# EAGLE board Final_v2 (EAGLE 8.6.3), part 1 of 7
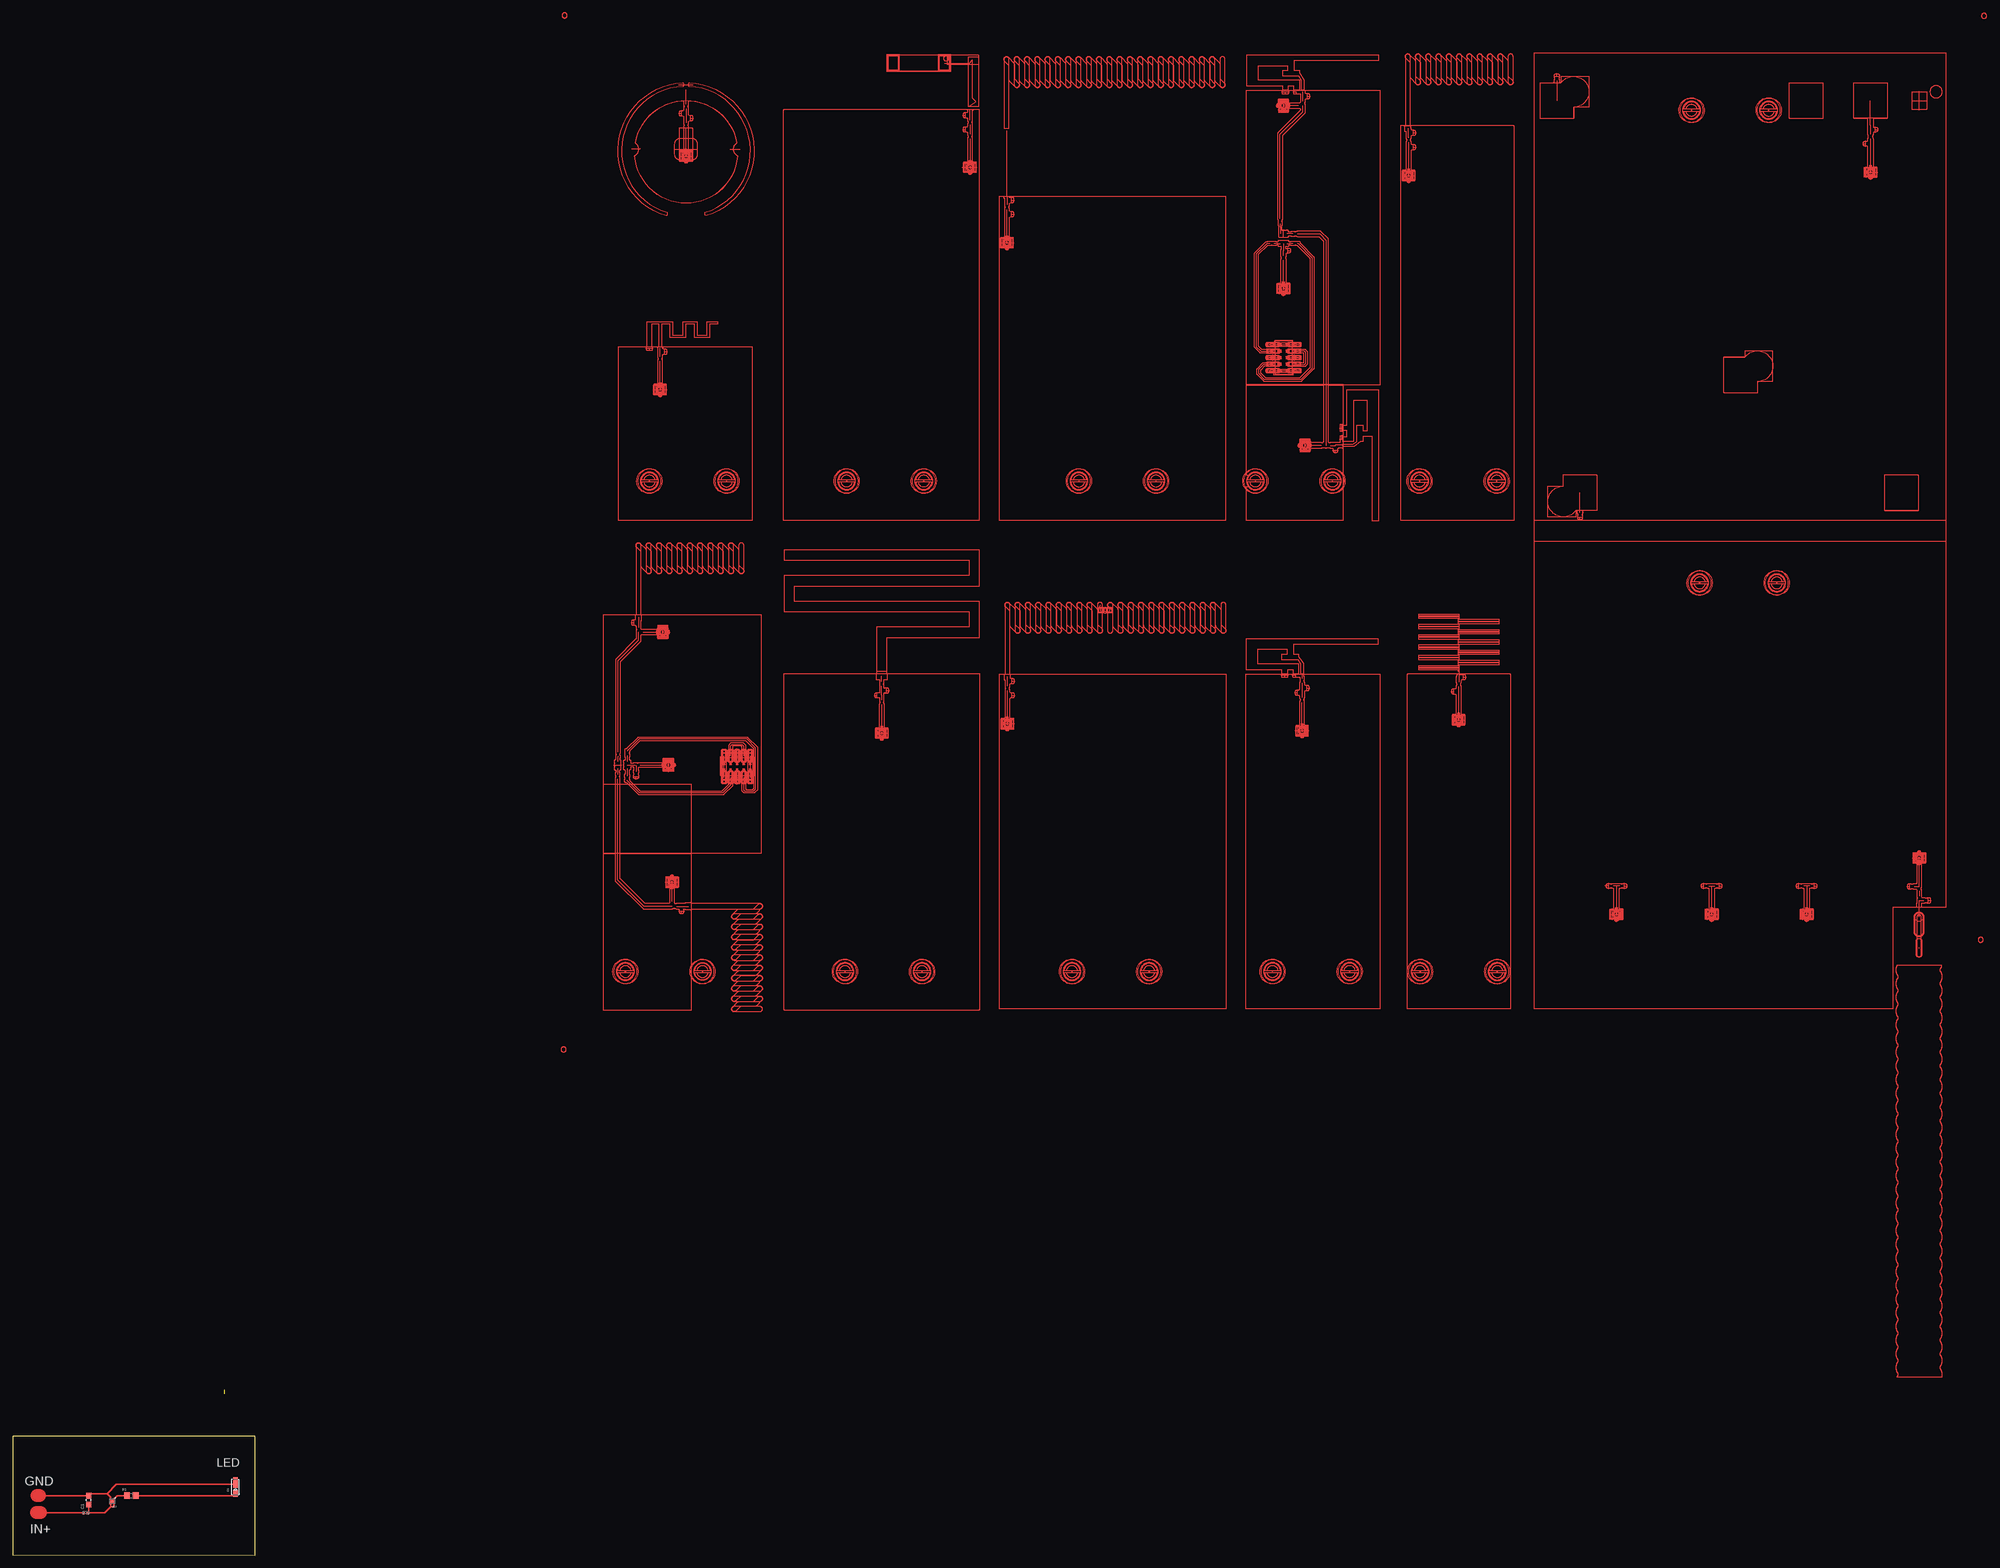
[diagram p0: board, top side]

Size 47.13 x 23.12 mm. Coordinates in mm from the lower left corner, seen from the top.
Outline: 0,0.02 47.13,0 47.13,23.09 0.01,23.12 0,0.02
Copper layers (1*16): Top 0.035mm / dielectric 1.5mm / Bottom 0.035mm
Design rules "default": minimum track width 6mil, minimum drill 0.35mm, track to track 6mil, track to pad 6mil, pad to pad 6mil, via to via 6mil, smd to smd 6mil, copper to edge 40mil, drill to drill 6mil, minimum pad ring 10mil, minimum via ring 8mil, stop-mask expansion 4mil, vias tented up to drill 0mil, thermal gap 10mil

## Footprints (pad centres in the part's own frame; a part is rotated, then mirrored left to right if it is on the bottom)
CAPC1608X90 = smd 1.1 x 1: 1 -0.85,0; 2 0.85,0
WL-SWTP_3014 = smd 2 x 0.8: 1 0.88,0 | smd 1.2 x 0.8: 2 -1.27,0
RESC1608X55 = smd 1.1 x 1.25: 1 -0.85,0; 2 0.85,0
0402_MURATA = smd 0.4 x 0.6: P$1 -0.4,0; P$2 0.4,0
REG_NCP160AMX180TBG = smd 0.1 x 0.1: 1 -0.325,-0.4; 2 0.325,-0.4; 3 0.325,0.4; 4 -0.325,0.4 | smd 0.52 x 0.52 rotated 45: 5 0,0

## Placement (x,y rotation side)
C1  06036D225KAT2A  [CAPC1608X90]  14.76,10.67 90 top
D1  WL-SWTP3014  [WL-SWTP_3014]  43.28,13.22 90 top
R1  CRCW06033K30FKEA  [RESC1608X55]  23.05,11.54 0 top
U$2  SCHOTTKY0402  [0402_MURATA]  14.21,8.22 0 top
U$3  NCP161_711AJ  [REG_NCP160AMX180TBG]  19.34,10.48 180 top

## Library data of the parts
C1 = Capacitor_2.2uF_0603; DESCRIPTION: 0603 2.2 uF 6.3 V ±10 % Tolerance X5R Surface Mount Multilayer Ceramic Capacitor; DIGI-KEY_PART_NUMBER: 478-1252-1-ND; DIGI-KEY_PURCHASE_URL: https://www.digikey.co.uk/product-detail/en/avx-corporation/06036D225KAT2A/478-1252-1-ND/564284?utm_source=snapeda&utm_medium=aggregator&utm_campaign=symbol; MF: AVX; MP: 06036D225KAT2A; PACKAGE: 0603 AVX
D1 = WL-SWTP; DESCRIPTION: SMD LED PLCC2 Daylight white 120 ° 3.2 V Wuerth Elektronik; DIGI-KEY_PART_NUMBER: 732-5661-1-ND; DIGI-KEY_PURCHASE_URL: https://www.digikey.co.uk/product-detail/en/wurth-electronics-inc/158301250/732-5661-1-ND/4947879?utm_source=snapeda&utm_medium=aggregator&utm_campaign=symbol; MF: Wurth Electronics; MP: 158301250; PACKAGE: 1206 Würth Elektronik
R1 = CRCW06033K30FKEA; DESCRIPTION: Res Thick Film 0603 3.3K Ohm 1% 0.1W_1/10W_ ?100ppm/C SMD Automotive Paper T/R; DIGI-KEY_PART_NUMBER: 541-3.30KHCT-ND; DIGI-KEY_PURCHASE_URL: https://www.digikey.com/product-detail/en/vishay-dale/CRCW06033K30FKEA/541-3.30KHCT-ND/1179866?utm_source=snapeda&utm_medium=aggregator&utm_campaign=symbol; MF: Vishay Dale; MP: CRCW06033K30FKEA; PACKAGE: 0603 Vishay
U$2 = Schottki_0402
U$3 = NCP160AMX180TBG

## Nets
GND: C1.2 D1.1 U$3.2
IN: C1.1 U$2.P$2 U$3.3 U$3.4
IN+: U$2.P$1
N$2: D1.2 R1.2
OUT: R1.1 U$3.1

## Tracks (layer width: path | path; a pad name or v marks a point on that pad's centre or on a via)
GND
  Top 0.254: U$3.2 19.02,11.22 18.31,11.92 | 18.31,11.92 20.11,13.72 42.91,13.72 D1.1 | 18.31,11.92 15.16,11.92 C1.2 5.21,11.53
  Top 2.54: 5.21,11.53 4.71,11.53
IN
  Top 0.254: U$3.3 19.02,9.35 | U$3.4 19.66,9.47 19.54,9.35 19.02,9.35 | 19.02,9.35 17.89,8.22 14.71,8.22 | 14.71,8.22 U$2.P$2 | C1.1 14.76,8.28 14.71,8.22
IN+
  Top 0.254: U$2.P$1 5.41,8.22
  Top 2.54: 5.41,8.22 4.61,8.22
N$1
  Top 0.001: 128.19,127.08 128.19,127.88 128.19,129.92
N$2
  Top 0.254: R1.2 42.87,11.54 D1.2
N$3
  Top 0.001: 122.56,179.51 125.44,179.51
N$4
  Top 0.001: 254.45,215.81 252.25,215.81
N$5
  Top 0.001: 249.97,281.9 248.07,281.9
N$6
  Top 0.001: 194.9,290.56 arc-180 195.6,291.26 196.62,290.25 arc-45 196.76,289.9 196.76,287.1 197.6,286.26 arc-180 196.89,285.56 195.91,286.54 arc-45 195.76,286.9 195.76,289.69 194.9,290.56
N$7  (2 unrouted)
N$8
  Top 0.001: 197.75,285.91 197.75,290.91 arc180 196.75,290.91 196.75,285.91 arc180 197.75,285.91
N$9
  Top 0.001: 196.89,290.56 arc-180 197.6,291.26 198.62,290.25 arc-45 198.76,289.9 198.76,287.1 199.6,286.26 arc-180 198.89,285.56 197.91,286.54 arc-45 197.76,286.9 197.76,289.69 196.89,290.56
N$10
  Top 0.001: 199.75,285.91 199.75,290.91 arc180 198.75,290.91 198.75,285.91 arc180 199.75,285.91
N$11
  Top 0.001: 198.9,290.56 arc-180 199.6,291.26 200.62,290.25 arc-45 200.76,289.9 200.76,287.1 201.6,286.26 arc-180 200.9,285.56 199.91,286.54 arc-45 199.76,286.9 199.76,289.69 198.9,290.56
N$12
  Top 0.001: 201.75,285.91 201.75,290.91 arc180 200.75,290.91 200.75,285.91 arc180 201.75,285.91
N$13
  Top 0.001: 200.9,290.56 arc-180 201.6,291.26 202.62,290.25 arc-45 202.76,289.9 202.76,287.1 203.6,286.26 arc-180 202.89,285.56 201.91,286.54 arc-45 201.76,286.9 201.76,289.69 200.9,290.56
N$14
  Top 0.001: 203.75,285.91 203.75,290.91 arc180 202.75,290.91 202.75,285.91 arc180 203.75,285.91
N$15
  Top 0.001: 202.89,290.56 arc-180 203.6,291.26 204.61,290.25 arc-45 204.76,289.9 204.76,287.1 205.6,286.26 arc-180 204.89,285.56 203.91,286.54 arc-45 203.76,286.9 203.76,289.69 202.89,290.56
N$16
  Top 0.001: 205.75,285.91 205.75,290.91 arc180 204.75,290.91 204.75,285.91 arc180 205.75,285.91
N$17
  Top 0.001: 204.9,290.56 arc-180 205.6,291.26 206.62,290.25 arc-45 206.76,289.9 206.76,287.1 207.6,286.26 arc-180 206.89,285.56 205.91,286.54 arc-45 205.76,286.9 205.76,289.69 204.9,290.56
N$18
  Top 0.001: 207.75,285.91 207.75,290.91 arc180 206.75,290.91 206.75,285.91 arc180 207.75,285.91
N$19
  Top 0.001: 206.89,290.56 arc-180 207.6,291.26 208.62,290.25 arc-45 208.76,289.9 208.76,287.1 209.6,286.26 arc-180 208.89,285.56 207.91,286.54 arc-45 207.76,286.9 207.76,289.69 206.89,290.56
N$20
  Top 0.001: 209.75,285.91 209.75,290.91 arc180 208.75,290.91 208.75,285.91 arc180 209.75,285.91
N$21
  Top 0.001: 208.9,290.56 arc-180 209.6,291.26 210.62,290.25 arc-45 210.76,289.9 210.76,287.1 211.6,286.26 arc-180 210.9,285.56 209.91,286.54 arc-45 209.76,286.9 209.76,289.69 208.9,290.56
N$22
  Top 0.001: 211.75,285.91 211.75,290.91 arc180 210.75,290.91 210.75,285.91 arc180 211.75,285.91
N$23
  Top 0.001: 210.9,290.56 arc-180 211.6,291.26 212.62,290.25 arc-45 212.76,289.9 212.76,287.1 213.6,286.26 arc-180 212.9,285.56 211.91,286.54 arc-45 211.76,286.9 211.76,289.69 210.9,290.56
N$24
  Top 0.001: 213.75,285.91 213.75,290.91 arc180 212.75,290.91 212.75,285.91 arc180 213.75,285.91
N$25
  Top 0.001: 212.9,290.56 arc-180 213.6,291.26 214.62,290.25 arc-45 214.76,289.9 214.76,287.1 215.6,286.26 arc-180 214.9,285.56 213.91,286.54 arc-45 213.76,286.9 213.76,289.69 212.9,290.56
N$26
  Top 0.001: 215.75,285.91 215.75,290.91 arc180 214.75,290.91 214.75,285.91 arc180 215.75,285.91
N$27
  Top 0.001: 214.9,290.56 arc-180 215.6,291.26 216.62,290.25 arc-45 216.76,289.9 216.76,287.1 217.6,286.26 arc-180 216.9,285.56 215.91,286.54 arc-45 215.76,286.9 215.76,289.69 214.9,290.56
N$28
  Top 0.001: 217.75,285.91 217.75,290.91 arc180 216.75,290.91 216.75,285.91 arc180 217.75,285.91
N$29
  Top 0.001: 216.9,290.56 arc-180 217.6,291.26 218.62,290.25 arc-45 218.76,289.9 218.76,287.1 219.6,286.26 arc-180 218.9,285.56 217.91,286.54 arc-45 217.76,286.9 217.76,289.69 216.9,290.56
N$30
  Top 0.001: 219.75,285.91 219.75,290.91 arc180 218.75,290.91 218.75,285.91 arc180 219.75,285.91
N$31
  Top 0.001: 218.9,290.56 arc-180 219.6,291.26 220.62,290.25 arc-45 220.76,289.9 220.76,287.1 221.6,286.26 arc-180 220.9,285.56 219.91,286.54 arc-45 219.76,286.9 219.76,289.69 218.9,290.56
N$32
  Top 0.001: 221.75,285.91 221.75,290.91 arc180 220.75,290.91 220.75,285.91 arc180 221.75,285.91
N$33
  Top 0.001: 220.9,290.56 arc-180 221.6,291.26 222.62,290.25 arc-45 222.76,289.9 222.76,287.1 223.6,286.26 arc-180 222.9,285.56 221.91,286.54 arc-45 221.76,286.9 221.76,289.69 220.9,290.56
N$34
  Top 0.001: 223.75,285.91 223.75,290.91 arc180 222.75,290.91 222.75,285.91 arc180 223.75,285.91
N$35
  Top 0.001: 222.9,290.56 arc-180 223.6,291.26 224.62,290.25 arc-45 224.76,289.9 224.76,287.1 225.6,286.26 arc-180 224.9,285.56 223.91,286.54 arc-45 223.76,286.9 223.76,289.69 222.9,290.56
N$36
  Top 0.001: 225.75,285.91 225.75,290.91 arc180 224.75,290.91 224.75,285.91 arc180 225.75,285.91
N$37
  Top 0.001: 224.9,290.56 arc-180 225.6,291.26 226.62,290.25 arc-45 226.76,289.9 226.76,287.1 227.6,286.26 arc-180 226.9,285.56 225.91,286.54 arc-45 225.76,286.9 225.76,289.69 224.9,290.56
N$38
  Top 0.001: 227.75,285.91 227.75,290.91 arc180 226.75,290.91 226.75,285.91 arc180 227.75,285.91
N$39
  Top 0.001: 226.9,290.56 arc-180 227.6,291.26 228.62,290.25 arc-45 228.76,289.9 228.76,287.1 229.6,286.26 arc-180 228.9,285.56 227.91,286.54 arc-45 227.76,286.9 227.76,289.69 226.9,290.56
N$40
  Top 0.001: 229.75,285.91 229.75,290.91 arc180 228.75,290.91 228.75,285.91 arc180 229.75,285.91
N$41
  Top 0.001: 228.9,290.56 arc-180 229.6,291.26 230.62,290.25 arc-45 230.76,289.9 230.76,287.1 231.6,286.26 arc-180 230.9,285.56 229.91,286.54 arc-45 229.76,286.9 229.76,289.69 228.9,290.56
N$42
  Top 0.001: 231.75,285.91 231.75,290.91 arc180 230.75,290.91 230.75,285.91 arc180 231.75,285.91
N$43
  Top 0.001: 230.9,290.56 arc-180 231.6,291.26 232.62,290.25 arc-45 232.76,289.9 232.76,287.1 233.6,286.26 arc-180 232.9,285.56 231.91,286.54 arc-45 231.76,286.9 231.76,289.69 230.9,290.56
N$44
  Top 0.001: 233.75,285.91 233.75,290.91 arc180 232.75,290.91 232.75,285.91 arc180 233.75,285.91
N$45
  Top 0.001: 232.9,290.56 arc-180 233.6,291.26 234.62,290.25 arc-45 234.76,289.9 234.76,287.1 235.6,286.26 arc-180 234.9,285.56 233.91,286.54 arc-45 233.76,286.9 233.76,289.69 232.9,290.56
N$46
  Top 0.001: 235.75,285.91 235.75,290.91 arc180 234.75,290.91 234.75,285.91 arc180 235.75,285.91
N$47
  Top 0.001: 192.9,290.56 arc-180 193.6,291.26 194.62,290.25 arc-45 194.76,289.9 194.76,287.1 195.6,286.26 arc-180 194.9,285.56 193.91,286.54 arc-45 193.76,286.9 193.76,289.69 192.9,290.56
N$48
  Top 0.001: 192.75,290.91 192.75,277.49 193.75,277.49 193.75,290.91 arc180 192.75,290.91
N$49
  Top 0.001: 195.75,285.91 195.75,290.91 arc180 194.75,290.91 194.75,285.91 arc180 195.75,285.91
N$50
  Top 0.001: 193.25,276.99 193.25,264.4 193.33,264.32 193.33,263.53 193.33,263.52 193.33,262.6
N$51
  Top 0.001: 193.41,169.03 193.41,169.96 193.42,169.97 193.42,170.87
N$52
  Top 0.001: 211.41,184.79 211.13,183.98 211.63,183.76
N$53
  Top 0.001: 211.91,179.79 211.91,184.79 arc180 210.91,184.79 210.91,179.79 arc180 211.91,179.79
N$54
  Top 0.001: 209.06,184.44 arc-180 209.77,185.14 210.78,184.13 arc-45 210.93,183.78 210.93,180.98 211.77,180.14 arc-180 211.06,179.44 210.07,180.42 arc-45 209.93,180.78 209.93,183.57 209.06,184.44
N$55
  Top 0.001: 209.92,179.79 209.92,184.79 arc180 208.92,184.79 208.92,179.79 arc180 209.92,179.79
N$56
  Top 0.001: 207.06,184.44 arc-180 207.77,185.14 208.78,184.13 arc-45 208.93,183.78 208.93,180.98 209.77,180.14 arc-180 209.06,179.44 208.07,180.42 arc-45 207.93,180.78 207.93,183.57 207.06,184.44
N$57
  Top 0.001: 207.91,179.79 207.91,184.79 arc180 206.91,184.79 206.91,179.79 arc180 207.91,179.79
N$58
  Top 0.001: 205.06,184.44 arc-180 205.77,185.14 206.78,184.13 arc-45 206.93,183.78 206.93,180.98 207.77,180.14 arc-180 207.06,179.44 206.07,180.42 arc-45 205.93,180.78 205.93,183.57 205.06,184.44
N$59
  Top 0.001: 205.91,179.79 205.91,184.79 arc180 204.91,184.79 204.91,179.79 arc180 205.91,179.79
N$60
  Top 0.001: 203.06,184.44 arc-180 203.77,185.14 204.78,184.13 arc-45 204.93,183.78 204.93,180.98 205.77,180.14 arc-180 205.06,179.44 204.07,180.42 arc-45 203.93,180.78 203.93,183.57 203.06,184.44
N$61
  Top 0.001: 203.91,179.79 203.91,184.79 arc180 202.91,184.79 202.91,179.79 arc180 203.91,179.79
N$62
  Top 0.001: 201.06,184.44 arc-180 201.77,185.14 202.78,184.13 arc-45 202.93,183.78 202.93,180.98 203.77,180.14 arc-180 203.06,179.44 202.07,180.42 arc-45 201.93,180.78 201.93,183.57 201.06,184.44
N$63
  Top 0.001: 201.91,179.79 201.91,184.79 arc180 200.91,184.79 200.91,179.79 arc180 201.91,179.79
N$64
  Top 0.001: 199.06,184.44 arc-180 199.77,185.14 200.78,184.13 arc-45 200.93,183.78 200.93,180.98 201.77,180.14 arc-180 201.06,179.44 200.07,180.42 arc-45 199.93,180.78 199.93,183.57 199.06,184.44
N$65
  Top 0.001: 199.92,179.79 199.92,184.79 arc180 198.92,184.79 198.92,179.79 arc180 199.92,179.79
N$66
  Top 0.001: 197.06,184.44 arc-180 197.77,185.14 198.78,184.13 arc-45 198.93,183.78 198.93,180.98 199.77,180.14 arc-180 199.06,179.44 198.07,180.42 arc-45 197.93,180.78 197.93,183.57 197.06,184.44
N$67
  Top 0.001: 197.91,179.79 197.91,184.79 arc180 196.91,184.79 196.91,179.79 arc180 197.91,179.79
N$68
  Top 0.001: 195.06,184.44 arc-180 195.77,185.14 196.78,184.13 arc-45 196.93,183.78 196.93,180.98 197.77,180.14 arc-180 197.06,179.44 196.07,180.42 arc-45 195.93,180.78 195.93,183.57 195.06,184.44
N$69
  Top 0.001: 195.91,179.79 195.91,184.79 arc180 194.91,184.79 194.91,179.79 arc180 195.91,179.79
N$70
  Top 0.001: 193.06,184.44 arc-180 193.77,185.14 194.78,184.13 arc-45 194.93,183.78 194.93,180.98 195.77,180.14 arc-180 195.06,179.44 194.08,180.42 arc-45 193.93,180.78 193.93,183.57 193.06,184.44
N$71
  Top 0.001: 192.92,184.79 192.92,171.37 193.92,171.37 193.92,184.79 arc180 192.92,184.79
N$72
  Top 0.001: 121.95,153.66 126.53,153.66
N$73
  Top 0.001: 168.99,160.81 168.99,165.38
N$74
  Top 0.001: 250.74,161.28 250.74,165.83
N$75
  Top 0.001: 249.87,256.95 254.18,256.95 255.35,255.78 255.35,215.81
N$76
  Top 0.001: 247.11,247.28 247.11,251.85
N$77
  Top 0.001: 186.18,275.43 186.18,274.63 186.17,274.63 186.17,270.86
N$78
  Top 0.001: 125.89,227.63 125.89,232.2
N$79
  Top 0.001: 130.93,273.06 130.93,277.63
N$80
  Top 0.001: 128.19,126.18 122.78,126.18 117.63,131.33 117.63,150.94 117.64,150.92
N$81
  Top 0.001: 311.87,130.13 311.29,130.13 | 311.87,130.13 311.88,130.12 311.88,125.56 | 312.49,130.13 311.87,130.13
N$82
  Top 0.001: 246.46,259.88 246.46,276.35 250.87,280.75 250.87,281.9
N$83
  Top 0.001: 139.6,155.44 139.6,157.39 139.9,157.69 141.85,157.69 142.14,157.39 142.14,155.44
N$84
  Top 0.001: 143.41,155.44 143.41,154.41 | 143.41,154.41 143.41,154.29 | 143.41,154.29 143.41,154.22 | 143.41,154.22 143.41,151.25 | 143.41,154.29 143.57,154.29 arc90 143.74,154.46 143.74,156.43 arc90 143.57,156.59 143.25,156.59 arc90 143.09,156.43 143.09,154.46 arc90 143.25,154.29 143.41,154.29 | 143.41,154.22 143.63,154.22 arc90 143.81,154.4 143.81,156.49 arc90 143.63,156.67 143.19,156.67 arc90 143.01,156.49 143.01,154.4 arc90 143.19,154.22 143.41,154.22 | 143.41,154.41 143.54,154.41 arc90 143.7,154.57 143.7,156.32 arc90 143.54,156.48 143.28,156.48 arc90 143.12,156.32 143.12,154.57 arc90 143.28,154.41 143.41,154.41
N$85
  Top 0.001: 245.05,230.34 248.02,230.34 | 248.02,230.34 248.1,230.34 | 248.1,230.34 248.21,230.34 | 248.21,230.34 249.25,230.34 | 248.1,230.34 248.1,230.17 arc90 248.26,230.01 250.23,230.01 arc90 250.4,230.17 250.4,230.5 arc90 250.23,230.66 248.26,230.66 arc90 248.1,230.5 248.1,230.34 | 248.02,230.34 248.02,230.12 arc90 248.2,229.94 250.29,229.94 arc90 250.47,230.12 250.47,230.55 arc90 250.29,230.73 248.2,230.73 arc90 248.02,230.55 248.02,230.34 | 248.21,230.34 248.21,230.2 arc90 248.37,230.04 250.12,230.04 arc90 250.28,230.2 250.28,230.47 arc90 250.12,230.63 248.37,230.63 arc90 248.21,230.47 248.21,230.34
N$86
  Top 0.001: 249.25,231.6 249.34,231.51 251.21,231.51 251.46,231.76 251.46,233.88 251.2,234.14 249.25,234.14
N$87
  Top 0.001: 107.61,98.32 arc180 106.61,98.32 arc180 107.61,98.32
N$88
  Top 0.001: 383.2,119.66 arc180 382.19,119.66 arc180 383.2,119.66
N$89
  Top 0.001: 383.86,299.35 arc180 382.86,299.35 arc180 383.86,299.35
N$90
  Top 0.001: 107.81,299.44 arc180 106.8,299.44 arc180 107.81,299.44
N$91
  Top 0.001: 129.44,285.92 132.34,285.92
N$92
  Top 0.001: 131.4,286.09 arc7 131.4,286.12 131.39,286.15 131.41,286.19 131.53,286.32 arc-50 131.6,286.35 arc-160 134.86,260.46 arc-54 134.77,260.48 134.64,260.57 arc-54 134.6,260.66 134.6,261.08 134.64,261.13 134.67,261.14 arc160 131.53,285.62 arc-46 131.46,285.65 131.4,285.73 arc5 131.4,285.75 131.4,286.09
N$93
  Top 0.001: 130.45,285.75 arc5 130.45,285.73 130.39,285.65 arc-46 130.32,285.62 arc160 127.21,261.13 127.24,261.12 127.28,261.06 127.28,260.64 arc-54 127.24,260.56 127.11,260.47 arc-54 127.02,260.45 arc-160 130.25,286.35 arc-50 130.33,286.32 130.45,286.19 130.46,286.15 130.46,286.12 arc7 130.45,286.09 130.45,285.75
N$94
  Top 0.001: 370.74,134.61 370.74,133.89 370.73,133.89 370.73,130.04 369.81,130.04
N$95
  Top 0.001: 370.73,129.14 370.73,128.21
N$97
  Top 0.001: 370.72,124.14 370.72,126.49 370.73,126.51 370.73,127.31 371.66,127.31
N$98
  Top 0.001: 193.33,256.2 193.33,259.97 193.33,259.98 193.33,261.7
N$99
  Top 0.001: 168.99,166.28 168.99,167.2 168.98,167.22 168.98,168.97
N$100
  Top 0.001: 250.73,171.12 250.74,171.11 250.74,170.47
N$101
  Top 0.001: 272.93,291.1 arc-180 273.63,291.8 274.65,290.79 arc-45 274.79,290.44 274.79,287.64 275.63,286.8 arc-180 274.92,286.1 273.94,287.08 arc-45 273.79,287.44 273.79,290.23 272.93,291.1
N$102
  Top 0.001: 275.78,286.45 275.78,291.45 arc180 274.78,291.45 274.78,286.45 arc180 275.78,286.45
N$103
  Top 0.001: 274.92,291.1 arc-180 275.63,291.8 276.65,290.79 arc-45 276.79,290.44 276.79,287.64 277.63,286.8 arc-180 276.92,286.1 275.94,287.08 arc-45 275.79,287.44 275.79,290.23 274.92,291.1
N$104
  Top 0.001: 277.78,286.45 277.78,291.45 arc180 276.78,291.45 276.78,286.45 arc180 277.78,286.45
N$105
  Top 0.001: 276.93,291.1 arc-180 277.63,291.8 278.65,290.79 arc-45 278.79,290.44 278.79,287.64 279.63,286.8 arc-180 278.93,286.1 277.94,287.08 arc-45 277.79,287.44 277.79,290.23 276.93,291.1
N$106
  Top 0.001: 279.78,286.45 279.78,291.45 arc180 278.78,291.45 278.78,286.45 arc180 279.78,286.45
N$107
  Top 0.001: 278.93,291.1 arc-180 279.63,291.8 280.65,290.79 arc-45 280.79,290.44 280.79,287.64 281.63,286.8 arc-180 280.92,286.1 279.94,287.08 arc-45 279.79,287.44 279.79,290.23 278.93,291.1
N$108
  Top 0.001: 281.78,286.45 281.78,291.45 arc180 280.78,291.45 280.78,286.45 arc180 281.78,286.45
N$109
  Top 0.001: 280.92,291.1 arc-180 281.63,291.8 282.64,290.79 arc-45 282.79,290.44 282.79,287.64 283.63,286.8 arc-180 282.92,286.1 281.94,287.08 arc-45 281.79,287.44 281.79,290.23 280.92,291.1
N$110
  Top 0.001: 283.78,286.45 283.78,291.45 arc180 282.78,291.45 282.78,286.45 arc180 283.78,286.45
N$111
  Top 0.001: 282.93,291.1 arc-180 283.63,291.8 284.65,290.79 arc-45 284.79,290.44 284.79,287.64 285.63,286.8 arc-180 284.92,286.1 283.94,287.08 arc-45 283.79,287.44 283.79,290.23 282.93,291.1
N$112
  Top 0.001: 285.78,286.45 285.78,291.45 arc180 284.78,291.45 284.78,286.45 arc180 285.78,286.45
N$113
  Top 0.001: 284.92,291.1 arc-180 285.63,291.8 286.65,290.79 arc-45 286.79,290.44 286.79,287.64 287.63,286.8 arc-180 286.92,286.1 285.94,287.08 arc-45 285.79,287.44 285.79,290.23 284.92,291.1
N$114
  Top 0.001: 287.78,286.45 287.78,291.45 arc180 286.78,291.45 286.78,286.45 arc180 287.78,286.45
N$115
  Top 0.001: 286.93,291.1 arc-180 287.63,291.8 288.65,290.79 arc-45 288.79,290.44 288.79,287.64 289.63,286.8 arc-180 288.93,286.1 287.94,287.08 arc-45 287.79,287.44 287.79,290.23 286.93,291.1
N$116
  Top 0.001: 289.78,286.45 289.78,291.45 arc180 288.78,291.45 288.78,286.45 arc180 289.78,286.45
N$117
  Top 0.001: 288.93,291.1 arc-180 289.63,291.8 290.65,290.79 arc-45 290.79,290.44 290.79,287.64 291.63,286.8 arc-180 290.93,286.1 289.94,287.08 arc-45 289.79,287.44 289.79,290.23 288.93,291.1
N$118
  Top 0.001: 291.78,286.45 291.78,291.45 arc180 290.78,291.45 290.78,286.45 arc180 291.78,286.45
N$119
  Top 0.001: 270.93,291.1 arc-180 271.63,291.8 272.65,290.79 arc-45 272.79,290.44 272.79,287.64 273.63,286.8 arc-180 272.93,286.1 271.94,287.08 arc-45 271.79,287.44 271.79,290.23 270.93,291.1
N$120
  Top 0.001: 270.78,291.45 270.78,278.03 271.78,278.03 271.78,291.45 arc180 270.78,291.45
N$121
  Top 0.001: 273.78,286.45 273.78,291.45 arc180 272.78,291.45 272.78,286.45 arc180 273.78,286.45
N$122
  Top 0.001: 271.46,269.25 271.46,274.77
N$124
  Top 0.001: 271.46,275.67 271.44,275.68 271.44,277.48 271.28,277.53
N$125
  Top 0.001: 144.94,124.54 arc-180 145.64,123.83 144.63,122.82 arc-45 144.28,122.67 141.48,122.67 140.64,121.83 arc-180 139.94,122.54 140.92,123.53 arc-45 141.28,123.67 144.07,123.67 144.94,124.54
N$126
  Top 0.001: 140.29,121.69 145.29,121.69 arc180 145.29,122.69 140.29,122.69 arc180 140.29,121.69
N$127
  Top 0.001: 144.94,122.54 arc-180 145.64,121.83 144.63,120.82 arc-45 144.28,120.67 141.48,120.67 140.64,119.83 arc-180 139.94,120.54 140.92,121.53 arc-45 141.28,121.67 144.07,121.67 144.94,122.54
N$128
  Top 0.001: 140.29,119.68 145.29,119.68 arc180 145.29,120.68 140.29,120.68 arc180 140.29,119.68
N$129
  Top 0.001: 144.94,120.54 arc-180 145.64,119.83 144.63,118.82 arc-45 144.28,118.67 141.48,118.67 140.64,117.83 arc-180 139.94,118.54 140.92,119.53 arc-45 141.28,119.67 144.07,119.67 144.94,120.54
N$130
  Top 0.001: 140.29,117.69 145.29,117.69 arc180 145.29,118.69 140.29,118.69 arc180 140.29,117.69
N$131
  Top 0.001: 144.94,118.54 arc-180 145.64,117.83 144.63,116.82 arc-45 144.28,116.67 141.48,116.67 140.64,115.83 arc-180 139.94,116.54 140.92,117.53 arc-45 141.28,117.67 144.07,117.67 144.94,118.54
N$132
  Top 0.001: 140.29,115.69 145.29,115.69 arc180 145.29,116.69 140.29,116.69 arc180 140.29,115.69
N$133
  Top 0.001: 144.94,116.54 arc-180 145.64,115.83 144.63,114.82 arc-45 144.28,114.67 141.48,114.67 140.64,113.83 arc-180 139.94,114.54 140.92,115.53 arc-45 141.28,115.67 144.07,115.67 144.94,116.54
N$134
  Top 0.001: 140.29,113.69 145.29,113.69 arc180 145.29,114.69 140.29,114.69 arc180 140.29,113.69
N$135
  Top 0.001: 144.94,114.54 arc-180 145.64,113.83 144.63,112.82 arc-45 144.28,112.67 141.48,112.67 140.64,111.83 arc-180 139.94,112.54 140.92,113.53 arc-45 141.28,113.67 144.07,113.67 144.94,114.54
N$136
  Top 0.001: 140.29,111.69 145.29,111.69 arc180 145.29,112.69 140.29,112.69 arc180 140.29,111.69
N$137
  Top 0.001: 144.94,112.54 arc-180 145.64,111.83 144.63,110.82 arc-45 144.28,110.67 141.48,110.67 140.64,109.83 arc-180 139.94,110.54 140.92,111.53 arc-45 141.28,111.67 144.07,111.67 144.94,112.54
N$138
  Top 0.001: 140.29,109.68 145.29,109.68 arc180 145.29,110.68 140.29,110.68 arc180 140.29,109.68
N$139
  Top 0.001: 144.94,110.54 arc-180 145.64,109.83 144.63,108.82 arc-45 144.28,108.67 141.48,108.67 140.64,107.83 arc-180 139.94,108.54 140.92,109.53 arc-45 141.28,109.67 144.07,109.67 144.94,110.54
N$140
  Top 0.001: 140.29,107.69 145.29,107.69 arc180 145.29,108.69 140.29,108.69 arc180 140.29,107.69
N$141
  Top 0.001: 144.94,108.54 arc-180 145.64,107.83 144.63,106.82 arc-45 144.28,106.67 141.48,106.67 140.64,105.83 arc-180 139.94,106.54 140.92,107.53 arc-45 141.28,107.67 144.07,107.67 144.94,108.54
N$142
  Top 0.001: 140.29,105.69 145.29,105.69 arc180 145.29,106.69 140.29,106.69 arc180 140.29,105.69
N$143
  Top 0.001: 144.94,126.54 arc-180 145.64,125.83 144.63,124.82 arc-45 144.28,124.67 141.48,124.67 140.64,123.83 arc-180 139.94,124.54 140.92,125.52 arc-45 141.28,125.67 144.07,125.67 144.94,126.54
N$144
  Top 0.001: 145.29,126.68 131.87,126.68 131.87,125.68 145.29,125.68 arc180 145.29,126.68
N$145
  Top 0.001: 140.29,123.69 145.29,123.69 arc180 145.29,124.69 140.29,124.69 arc180 140.29,123.69
N$146
  Top 0.001: 213.91,179.79 213.91,184.79 arc180 212.91,184.79 212.91,179.79 arc180 213.91,179.79
N$147
  Top 0.001: 213.06,184.44 arc-180 213.77,185.14 214.78,184.13 arc-45 214.93,183.78 214.93,180.98 215.77,180.14 arc-180 215.06,179.44 214.07,180.42 arc-45 213.93,180.78 213.93,183.57 213.06,184.44
N$148
  Top 0.001: 215.91,179.79 215.91,184.79 arc180 214.91,184.79 214.91,179.79 arc180 215.91,179.79
N$149
  Top 0.001: 215.06,184.44 arc-180 215.77,185.14 216.78,184.13 arc-45 216.93,183.78 216.93,180.98 217.77,180.14 arc-180 217.06,179.44 216.07,180.42 arc-45 215.93,180.78 215.93,183.57 215.06,184.44
N$150
  Top 0.001: 217.91,179.79 217.91,184.79 arc180 216.91,184.79 216.91,179.79 arc180 217.91,179.79
N$151
  Top 0.001: 217.06,184.44 arc-180 217.77,185.14 218.78,184.13 arc-45 218.93,183.78 218.93,180.98 219.77,180.14 arc-180 219.06,179.44 218.07,180.42 arc-45 217.93,180.78 217.93,183.57 217.06,184.44
N$152
  Top 0.001: 219.91,179.79 219.91,184.79 arc180 218.91,184.79 218.91,179.79 arc180 219.91,179.79
N$153
  Top 0.001: 219.06,184.44 arc-180 219.77,185.14 220.78,184.13 arc-45 220.93,183.78 220.93,180.98 221.77,180.14 arc-180 221.06,179.44 220.07,180.42 arc-45 219.93,180.78 219.93,183.57 219.06,184.44
N$154
  Top 0.001: 221.91,179.79 221.91,184.79 arc180 220.91,184.79 220.91,179.79 arc180 221.91,179.79
N$155
  Top 0.001: 221.06,184.44 arc-180 221.77,185.14 222.78,184.13 arc-45 222.93,183.78 222.93,180.98 223.77,180.14 arc-180 223.06,179.44 222.07,180.42 arc-45 221.93,180.78 221.93,183.57 221.06,184.44
N$156
  Top 0.001: 223.91,179.79 223.91,184.79 arc180 222.91,184.79 222.91,179.79 arc180 223.91,179.79
N$157
  Top 0.001: 223.06,184.44 arc-180 223.77,185.14 224.78,184.13 arc-45 224.93,183.78 224.93,180.98 225.77,180.14 arc-180 225.06,179.44 224.07,180.42 arc-45 223.93,180.78 223.93,183.57 223.06,184.44
N$158
  Top 0.001: 225.91,179.79 225.91,184.79 arc180 224.91,184.79 224.91,179.79 arc180 225.91,179.79
N$159
  Top 0.001: 225.06,184.44 arc-180 225.77,185.14 226.78,184.13 arc-45 226.93,183.78 226.93,180.98 227.77,180.14 arc-180 227.06,179.44 226.07,180.42 arc-45 225.93,180.78 225.93,183.57 225.06,184.44
N$160
  Top 0.001: 227.91,179.79 227.91,184.79 arc180 226.91,184.79 226.91,179.79 arc180 227.91,179.79
N$161
  Top 0.001: 227.06,184.44 arc-180 227.77,185.14 228.78,184.13 arc-45 228.93,183.78 228.93,180.98 229.77,180.14 arc-180 229.06,179.44 228.07,180.42 arc-45 227.93,180.78 227.93,183.57 227.06,184.44
N$162
  Top 0.001: 229.91,179.79 229.91,184.79 arc180 228.91,184.79 228.91,179.79 arc180 229.91,179.79
N$163
  Top 0.001: 229.06,184.44 arc-180 229.77,185.14 230.78,184.13 arc-45 230.93,183.78 230.93,180.98 231.77,180.14 arc-180 231.06,179.44 230.07,180.42 arc-45 229.93,180.78 229.93,183.57 229.06,184.44
N$164
  Top 0.001: 231.91,179.79 231.91,184.79 arc180 230.91,184.79 230.91,179.79 arc180 231.91,179.79
N$165
  Top 0.001: 231.06,184.44 arc-180 231.77,185.14 232.78,184.13 arc-45 232.93,183.78 232.93,180.98 233.77,180.14 arc-180 233.06,179.44 232.07,180.42 arc-45 231.93,180.78 231.93,183.57 231.06,184.44
N$166
  Top 0.001: 233.91,179.79 233.91,184.79 arc180 232.91,184.79 232.91,179.79 arc180 233.91,179.79
N$167
  Top 0.001: 233.06,184.44 arc-180 233.77,185.14 234.78,184.13 arc-45 234.93,183.78 234.93,180.98 235.77,180.14 arc-180 235.06,179.44 234.07,180.42 arc-45 233.93,180.78 233.93,183.57 233.06,184.44
N$168
  Top 0.001: 235.91,179.79 235.91,184.79 arc180 234.91,184.79 234.91,179.79 arc180 235.91,179.79
N$169
  Top 0.001: 123.31,196.01 arc-180 124.02,196.71 125.04,195.7 arc-45 125.18,195.35 125.18,192.55 126.02,191.71 arc-180 125.31,191.01 124.33,191.99 arc-45 124.18,192.35 124.18,195.14 123.31,196.01
N$170
  Top 0.001: 126.17,191.36 126.17,196.36 arc180 125.17,196.36 125.17,191.36 arc180 126.17,191.36
N$171
  Top 0.001: 125.31,196.01 arc-180 126.02,196.71 127.03,195.7 arc-45 127.18,195.35 127.18,192.55 128.02,191.71 arc-180 127.31,191.01 126.33,191.99 arc-45 126.18,192.35 126.18,195.14 125.31,196.01
N$172
  Top 0.001: 128.17,191.36 128.17,196.36 arc180 127.17,196.36 127.17,191.36 arc180 128.17,191.36
N$173
  Top 0.001: 127.32,196.01 arc-180 128.02,196.71 129.04,195.7 arc-45 129.18,195.35 129.18,192.55 130.02,191.71 arc-180 129.32,191.01 128.33,191.99 arc-45 128.18,192.35 128.18,195.14 127.32,196.01
N$174
  Top 0.001: 130.17,191.36 130.17,196.36 arc180 129.17,196.36 129.17,191.36 arc180 130.17,191.36
N$175
  Top 0.001: 129.32,196.01 arc-180 130.02,196.71 131.04,195.7 arc-45 131.18,195.35 131.18,192.55 132.02,191.71 arc-180 131.31,191.01 130.33,191.99 arc-45 130.18,192.35 130.18,195.14 129.32,196.01
N$176
  Top 0.001: 132.17,191.36 132.17,196.36 arc180 131.17,196.36 131.17,191.36 arc180 132.17,191.36
N$177
  Top 0.001: 131.31,196.01 arc-180 132.02,196.71 133.03,195.7 arc-45 133.18,195.35 133.18,192.55 134.02,191.71 arc-180 133.31,191.01 132.33,191.99 arc-45 132.18,192.35 132.18,195.14 131.31,196.01
N$178
  Top 0.001: 134.17,191.36 134.17,196.36 arc180 133.17,196.36 133.17,191.36 arc180 134.17,191.36
N$179
  Top 0.001: 133.32,196.01 arc-180 134.02,196.71 135.04,195.7 arc-45 135.18,195.35 135.18,192.55 136.02,191.71 arc-180 135.31,191.01 134.33,191.99 arc-45 134.18,192.35 134.18,195.14 133.32,196.01
N$180
  Top 0.001: 136.17,191.36 136.17,196.36 arc180 135.17,196.36 135.17,191.36 arc180 136.17,191.36
N$181
  Top 0.001: 135.31,196.01 arc-180 136.02,196.71 137.04,195.7 arc-45 137.18,195.35 137.18,192.55 138.02,191.71 arc-180 137.31,191.01 136.33,191.99 arc-45 136.18,192.35 136.18,195.14 135.31,196.01
N$182
  Top 0.001: 138.17,191.36 138.17,196.36 arc180 137.17,196.36 137.17,191.36 arc180 138.17,191.36
N$183
  Top 0.001: 137.32,196.01 arc-180 138.02,196.71 139.04,195.7 arc-45 139.18,195.35 139.18,192.55 140.02,191.71 arc-180 139.32,191.01 138.33,191.99 arc-45 138.18,192.35 138.18,195.14 137.32,196.01
N$184
  Top 0.001: 140.17,191.36 140.17,196.36 arc180 139.17,196.36 139.17,191.36 arc180 140.17,191.36
N$185
  Top 0.001: 139.32,196.01 arc-180 140.02,196.71 141.04,195.7 arc-45 141.18,195.35 141.18,192.55 142.02,191.71 arc-180 141.32,191.01 140.33,191.99 arc-45 140.18,192.35 140.18,195.14 139.32,196.01
N$186
  Top 0.001: 142.17,191.36 142.17,196.36 arc180 141.17,196.36 141.17,191.36 arc180 142.17,191.36
N$187
  Top 0.001: 121.32,196.01 arc-180 122.02,196.71 123.04,195.7 arc-45 123.18,195.35 123.18,192.55 124.02,191.71 arc-180 123.31,191.01 122.33,191.99 arc-45 122.18,192.35 122.18,195.14 121.32,196.01
N$188
  Top 0.001: 121.17,196.36 121.17,182.94 122.17,182.94 122.17,196.36 arc180 121.17,196.36
N$189
  Top 0.001: 124.17,191.36 124.17,196.36 arc180 123.17,196.36 123.17,191.36 arc180 124.17,191.36
N$190
  Top 0.001: 121.67,182.44 121.67,181.34 121.67,180.41
N$191
  Top 0.001: 361.29,269.91 361.29,274.47 361.28,274.48 361.28,275.42
N$192
  Top 0.001: 250.87,282.8 250.87,284.62 250.86,284.64
N$193
  Top 0.001: 348.86,130.13 348.86,125.56 | 348.86,130.13 348.26,130.13 | 349.47,130.13 348.86,130.13
N$194
  Top 0.001: 186.18,278.19 186.18,276.33
N$195
  Top 0.001: 250.74,169.56 250.74,168.63 250.74,166.81
N$196
  Top 0.001: 130.93,281.31 130.93,278.53
N$197
  Top 0.001: 193.41,162.63 193.41,168.13
N$199
  Top 0.001: 121.67,179.51 121.67,177.96 117.68,173.97 117.68,156.16 117.69,156.17
N$200
  Top 0.001: 129.09,126.18 130.02,126.18 130.03,126.18 131.37,126.18
N$201
  Top 0.001: 117.62,153.01 117.63,153 117.63,151.84
N$202
  Top 0.001: 117.68,155.26 117.62,155.2 117.62,154.31
N$203
  Top 0.001: 130.93,282.21 130.93,285.02
N$204
  Top 0.001: 300.27,286.73 300.28,286.72 300.28,282.89
N$205
  Top 0.001: 304.8,202.76 304.78,202.78 304.78,206.59
N$206
  Top 0.001: 244.38,255.1 244.36,255.09 243.87,255.09 241.79,253 241.79,235.06 242.71,234.14 243.82,234.14 | 243.82,234.14 243.9,234.14 | 243.9,234.14 244.01,234.14 | 244.01,234.14 245.05,234.14 | 243.9,234.14 243.9,233.98 arc90 244.06,233.82 246.03,233.82 arc90 246.2,233.98 246.2,234.31 arc90 246.03,234.47 244.06,234.47 arc90 243.9,234.31 243.9,234.14 | 243.82,234.14 243.82,233.93 arc90 244,233.75 246.09,233.75 arc90 246.27,233.93 246.27,234.36 arc90 246.09,234.54 244,234.54 arc90 243.82,234.36 243.82,234.14 | 244.01,234.14 244.01,234.01 arc90 244.17,233.85 245.92,233.85 arc90 246.08,234.01 246.08,234.28 arc90 245.92,234.44 244.17,234.44 arc90 244.01,234.28 244.01,234.14
N$207
  Top 0.001: 245.05,235.41 248.02,235.41 | 248.02,235.41 248.1,235.41 | 248.1,235.41 248.21,235.41 | 248.21,235.41 249.25,235.41 | 248.1,235.41 248.1,235.25 arc90 248.26,235.09 250.23,235.09 arc90 250.4,235.25 250.4,235.58 arc90 250.23,235.74 248.26,235.74 arc90 248.1,235.58 248.1,235.41 | 248.02,235.41 248.02,235.2 arc90 248.2,235.01 250.29,235.01 arc90 250.47,235.2 250.47,235.63 arc90 250.29,235.81 248.2,235.81 arc90 248.02,235.63 248.02,235.41 | 248.21,235.41 248.21,235.28 arc90 248.37,235.12 250.12,235.12 arc90 250.28,235.28 250.28,235.54 arc90 250.12,235.71 248.37,235.71 arc90 248.21,235.54 248.21,235.41
N$208
  Top 0.001: 249.87,255.1 249.88,255.1 252.66,252.32 252.66,230.79 250.47,228.6 243.45,228.6 242.32,229.73 242.32,230.6 243.32,231.6 243.82,231.6 | 243.82,231.6 243.9,231.6 | 243.9,231.6 244.01,231.6 | 244.01,231.6 245.05,231.6 | 243.9,231.6 243.9,231.44 arc90 244.06,231.28 246.03,231.28 arc90 246.2,231.44 246.2,231.77 arc90 246.03,231.93 244.06,231.93 arc90 243.9,231.77 243.9,231.6 | 243.82,231.6 243.82,231.39 arc90 244,231.2 246.09,231.2 arc90 246.27,231.39 246.27,231.82 arc90 246.09,232 244,232 arc90 243.82,231.82 243.82,231.6 | 244.01,231.6 244.01,231.47 arc90 244.17,231.31 245.92,231.31 arc90 246.08,231.47 246.08,231.73 arc90 245.92,231.9 244.17,231.9 arc90 244.01,231.73 244.01,231.6
N$209
  Top 0.001: 138.33,151.25 138.33,154.22 | 138.33,154.22 138.33,154.29 | 138.33,154.29 138.33,154.41 | 138.33,154.41 138.33,155.44 | 138.33,154.29 138.49,154.29 arc90 138.66,154.46 138.66,156.43 arc90 138.49,156.59 138.17,156.59 arc90 138.01,156.43 138.01,154.46 arc90 138.17,154.29 138.33,154.29 | 138.33,154.22 138.55,154.22 arc90 138.73,154.4 138.73,156.49 arc90 138.55,156.67 138.11,156.67 arc90 137.93,156.49 137.93,154.4 arc90 138.11,154.22 138.33,154.22 | 138.33,154.41 138.46,154.41 arc90 138.62,154.57 138.62,156.32 arc90 138.46,156.48 138.2,156.48 arc90 138.04,156.32 138.04,154.57 arc90 138.2,154.41 138.33,154.41
N$211
  Top 0.001: 247.12,255.09 247.11,255.09 247.11,253.69 247.11,252.75
N$212
  Top 0.001: 245.28,255.1 245.94,255.1 245.94,255.09 246.47,255.09
N$213
  Top 0.001: 247.77,255.09 248.31,255.09 248.32,255.1 248.97,255.1
N$214
  Top 0.001: 119.48,153.66 120.4,153.66 121.05,153.66 121.2,153.5 121.2,152.35
N$215
  Top 0.001: 119.5,155.51 119.5,154.86 119.48,154.85 119.48,154.31
N$216
  Top 0.001: 119.48,153.01 119.48,152.48 119.47,152.47 119.47,151.53
N$217
  Top 0.001: 142.14,151.25 142.14,150.21 | 142.14,150.21 142.14,150.09 | 142.14,150.09 142.14,150.02 | 142.14,150.02 142.14,148.76 142.33,148.58 144.07,148.58 144.46,148.97 144.46,156.98 142.74,158.7 121.78,158.7 119.5,156.42 119.5,156.41 | 142.14,150.09 142.3,150.09 arc90 142.47,150.26 142.47,152.23 arc90 142.3,152.39 141.98,152.39 arc90 141.82,152.23 141.82,150.26 arc90 141.98,150.09 142.14,150.09 | 142.14,150.02 142.36,150.02 arc90 142.54,150.2 142.54,152.29 arc90 142.36,152.47 141.92,152.47 arc90 141.74,152.29 141.74,150.2 arc90 141.92,150.02 142.14,150.02 | 142.14,150.21 142.27,150.21 arc90 142.43,150.37 142.43,152.12 arc90 142.27,152.28 142.01,152.28 arc90 141.85,152.12 141.85,150.37 arc90 142.01,150.21 142.14,150.21
N$218
  Top 0.001: 139.6,151.25 139.6,150.21 | 139.6,150.21 139.6,150.09 | 139.6,150.09 139.6,150.02 | 139.6,150.02 139.6,149.77 138.04,148.21 121.89,148.21 119.47,150.62 119.47,150.63 | 139.6,150.09 139.76,150.09 arc90 139.93,150.26 139.93,152.23 arc90 139.76,152.39 139.44,152.39 arc90 139.28,152.23 139.28,150.26 arc90 139.44,150.09 139.6,150.09 | 139.6,150.02 139.82,150.02 arc90 140,150.2 140,152.29 arc90 139.82,152.47 139.38,152.47 arc90 139.2,152.29 139.2,150.2 arc90 139.38,150.02 139.6,150.02 | 139.6,150.21 139.73,150.21 arc90 139.89,150.37 139.89,152.12 arc90 139.73,152.28 139.47,152.28 arc90 139.31,152.12 139.31,150.37 arc90 139.47,150.21 139.6,150.21
N$219
  Top 0.001: 246.46,258.98 246.46,258.33 246.47,258.32 246.47,256.96
N$220
  Top 0.001: 248.97,256.95 248.31,256.95 248.3,256.96 247.77,256.96
N$221
  Top 0.001: 361.28,276.31 361.28,278.09 361.28,278.1 361.28,282.89
N$222
  Top 0.001: 281.31,172.44 273.56,172.44 273.56,172.69 281.31,172.69 281.31,173.19 289.06,173.19 289.06,173.94 281.31,173.94 281.31,174.44 273.56,174.44 273.56,174.69 281.31,174.69 281.31,175.19 289.06,175.19 289.06,175.94 281.31,175.94 281.31,176.44 273.56,176.44 273.56,176.69 281.31,176.69 281.31,177.19 289.06,177.19 289.06,177.94 281.31,177.94 281.31,178.44 273.56,178.44 273.56,178.69 281.31,178.69 281.31,179.19 289.06,179.19 289.06,179.94 281.31,179.94 281.31,180.44 273.56,180.44 273.56,180.69 281.31,180.69 281.31,181.19 289.06,181.19 289.06,181.94 281.31,181.94 281.31,182.44 273.56,182.44 273.56,182.69 281.31,182.69 281.31,182.94 273.31,182.94 273.31,182.19 281.06,182.19 281.06,181.69 288.81,181.69 288.81,181.44 281.06,181.44 281.06,180.94 273.31,180.94 273.31,180.19 281.06,180.19 281.06,179.69 288.81,179.69 288.81,179.44 281.06,179.44 281.06,178.94 273.31,178.94 273.31,178.19 281.06,178.19 281.06,177.69 288.81,177.69 288.81,177.44 281.06,177.44 281.06,176.94 273.31,176.94 273.31,176.19 281.06,176.19 281.06,175.69 288.81,175.69 288.81,175.44 281.06,175.44 281.06,174.94 273.31,174.94 273.31,174.19 281.06,174.19 281.06,173.69 288.81,173.69 288.81,173.44 281.06,173.44 281.06,172.94 273.31,172.94 273.31,172.19 281.06,172.19 281.06,171.94 281.31,171.94 281.31,172.19 281.31,172.44
N$224
  Top 0.001: 281.18,171.81 281.19,171.81 281.19,169.81 281.18,169.8
N$225
  Top 0.001: 281.18,163.39 281.18,168.9
N$226
  Top 0.001: 168.98,169.88 168.99,169.88 168.99,170.97 168.97,170.98
N$227
  Top 0.001: 186.18,279.09 186.18,280.96
N$228
  Top 0.001: 186.18,281.86 187.33,282.62 186.64,283.31 186.64,290.79 186.04,290.19 181.2,290.19
N$229
  Top 0.001: 181.87,291.79 arc90 181.77,291.69 181.77,289.94 arc90 181.87,289.84 187.68,289.84 arc90 187.78,289.94 187.78,291.69 arc90 187.68,291.79 182.3,291.79 | 181.87,291.79 182.3,291.79 | 182.3,291.79 182.3,288.59 180.1,288.59 180.1,291.79 181.87,291.79
N$230
  Top 0.001: 187.68,281.65 185.93,281.65 arc-90 185.83,281.75 185.83,291.33 arc-90 185.93,291.43 187.68,291.43 arc-90 187.78,291.33 187.78,281.75 arc-90 187.68,281.65
N$231
  Top 0.001: 125.89,234.75 125.89,234.74 125.89,233.1
N$233
  Top 0.001: 169.99,178.47 169.99,171.97 167.99,171.97 167.99,180.47 | 169.99,178.47 187.99,178.47 | 187.99,178.47 187.99,185.47 | 187.99,185.47 151.99,185.47 | 151.99,185.47 151.99,188.47 | 151.99,188.47 187.99,188.47 | 187.99,188.47 187.99,195.47 | 187.99,195.47 149.99,195.47 | 149.99,195.47 149.99,193.47 | 149.99,193.47 185.99,193.47 | 185.99,193.47 185.99,190.47 | 185.99,190.47 149.99,190.47 | 149.99,190.47 149.99,183.47 | 149.99,183.47 185.99,183.47 | 185.99,183.47 185.99,180.47 | 185.99,180.47 167.99,180.47 | 169.99,178.47 169.99,171.47 167.99,171.47 167.99,180.47 | 187.99,178.47 187.99,185.47 | 151.99,185.47 151.99,188.47 | 187.99,188.47 187.99,195.47 | 149.99,195.47 149.99,193.47 | 185.99,193.47 185.99,190.47 | 149.99,190.47 149.99,183.47 | 185.99,183.47 185.99,180.47
N$235
  Top 0.001: 330.38,125.56 330.38,130.12 330.38,130.13 | 330.38,130.13 330.98,130.13 | 329.79,130.13 330.38,130.13
N$237
  Top 0.001: 256.25,215.81 257.23,215.81 257.25,215.84 258.46,215.84
N$238
  Top 0.001: 259.44,226.69 265.62,226.69 265.61,201.11 264.41,201.11 264.41,217.51 262.61,217.51 262.61,216.51 262.1,216.51 260.78,215.6 258.71,215.6 258.71,216.06 260.64,216.07 261.4,216.59 261.39,219.72 262.61,219.72 262.61,218.72 263.41,218.72 263.41,224.51 260.74,224.51 260.74,216.51 258.71,216.51 258.71,217.51 259.44,217.51 259.45,218.72 258.71,218.72 258.71,219.72 259.44,219.72 259.44,226.69
N$239
  Top 0.001: 240,285.62 240,291.8 265.57,291.8 265.57,290.59 249.18,290.59 249.18,288.79 250.18,288.79 250.18,288.28 251.09,286.96 251.09,284.89 250.62,284.89 250.62,286.82 250.1,287.58 246.98,287.58 246.98,288.79 247.98,288.79 247.98,289.59 242.18,289.59 242.18,286.92 250.18,286.92 250.18,284.89 249.18,284.89 249.18,285.62 247.98,285.62 247.98,284.89 246.98,284.89 246.98,285.62 240,285.62
N$240
  Top 0.001: 239.87,172.11 239.87,178.28 265.45,178.28 265.45,177.07 249.05,177.07 249.05,175.28 250.05,175.28 250.05,174.77 250.96,173.45 250.96,171.38 250.5,171.38 250.5,173.31 249.98,174.06 246.85,174.06 246.85,175.28 247.85,175.28 247.85,176.07 242.05,176.07 242.05,173.41 250.05,173.41 250.05,171.38 249.05,171.38 249.05,172.11 247.85,172.11 247.85,171.38 246.85,171.38 246.85,172.11 239.87,172.11
N$242
  Top 0.001: 128.99,130.87 129.54,130.87 | 128.99,130.87 128.99,131.97 | 128.99,129.77 128.99,130.87 | 128.43,130.87 128.69,130.87 | 128.69,130.87 128.79,130.87 | 128.79,130.87 128.84,130.87 | 128.84,130.87 128.99,130.87 | 126.83,130.87 127.39,130.87 | 127.39,130.87 127.39,131.97 | 127.39,129.77 127.39,130.87 | 127.39,130.87 127.53,130.87 | 127.53,130.87 127.58,130.87 | 127.58,130.87 127.69,130.87 | 127.69,130.87 127.94,130.87 | 128.79,130.87 arc180 127.58,130.87 | 127.58,130.87 arc180 128.79,130.87 | 128.84,130.87 arc180 127.53,130.87 | 127.53,130.87 arc180 128.84,130.87 | 128.69,130.87 arc180 127.69,130.87 | 127.69,130.87 arc180 128.69,130.87 | 128.84,130.87 arc180 127.53,130.87 | 127.53,130.87 arc180 128.84,130.87
N$244
  Top 0.001: 127.84,130.42 127.84,130.45 arc-101 127.84,131.29 127.84,131.36 arc-45 127.87,131.44 arc-45 127.94,131.47 127.96,131.47 127.98,131.45 127.99,131.45 arc28 128.12,131.42 128.25,131.42 arc28 128.38,131.45 128.39,131.45 128.4,131.46 128.42,131.47 128.43,131.47 arc-45 128.5,131.44 arc-45 128.53,131.36 128.53,131.29 arc-101 128.53,130.45 128.53,130.42 128.48,130.36 128.41,130.36 128.39,130.37 arc49 127.98,130.37 127.96,130.36 127.89,130.36 127.84,130.42
N$245
  Top 0.001: 116.84,153.66 118.4,153.66
N$246
  Top 0.001: 120.63,151.45 121.2,151.45 | 121.2,151.45 121.78,151.45 | 121.2,150.87 121.2,151.45
N$247
  Top 0.001: 120.77,180.77 120.77,181.34 | 120.77,181.34 120.77,181.91 | 120.19,181.34 120.77,181.34
N$248
  Top 0.001: 127.48,152.3 127.48,152.85 | 127.48,152.85 127.48,153.41 | 127.48,152.85 128.59,152.85 | 126.38,152.85 127.48,152.85
N$249
  Top 0.001: 127.48,153.9 127.48,154.45 | 127.48,154.45 127.48,155.01 | 127.48,154.45 128.59,154.45 | 126.38,154.45 127.48,154.45
N$250
  Top 0.001: 126.39,178.16 126.39,178.72 | 126.39,178.72 126.39,179.27 | 126.39,178.72 127.5,178.72 | 125.29,178.72 126.39,178.72
N$252
  Top 0.001: 126.39,179.76 126.39,180.31 | 126.39,180.31 126.39,180.87 | 126.39,180.31 127.5,180.31 | 125.29,180.31 126.39,180.31
N$253
  Top 0.001: 126.82,179.17 arc-112 125.91,179.25 arc-50 125.91,179.34 arc42 125.91,179.69 arc-50 125.91,179.78 arc-112 126.82,179.86 126.89,179.86 arc-90 126.99,179.76 126.99,179.74 126.98,179.72 arc28 126.94,179.58 126.94,179.45 arc28 126.98,179.31 126.98,179.3 126.99,179.28 126.99,179.27 arc-90 126.89,179.17 126.82,179.17
N$255
  Top 0.001: 127.91,153.31 arc-112 127,153.39 arc-50 127,153.48 arc42 127,153.83 arc-50 127,153.92 arc-112 127.91,154 127.98,154 arc-90 128.08,153.9 128.08,153.88 128.07,153.85 arc28 128.03,153.72 128.03,153.59 arc28 128.07,153.45 128.07,153.44 128.08,153.42 128.08,153.41 arc-90 127.98,153.31 127.91,153.31
N$256
  Top 0.001: 140.29,151.25 140.87,151.25 | 140.87,151.25 141.45,151.25 | 140.87,151.25 140.87,152.65 | 140.87,149.84 140.87,150.02 | 140.87,150.02 140.87,150.09 | 140.87,150.09 140.87,150.21 | 140.87,150.21 140.87,151.25 | 140.87,150.09 141.03,150.09 arc90 141.2,150.26 141.2,152.23 arc90 141.03,152.39 140.71,152.39 arc90 140.55,152.23 140.55,150.26 arc90 140.71,150.09 140.87,150.09 | 140.87,150.02 141.09,150.02 arc90 141.27,150.2 141.27,152.29 arc90 141.09,152.47 140.65,152.47 arc90 140.47,152.29 140.47,150.2 arc90 140.65,150.02 140.87,150.02 | 140.87,150.21 141,150.21 arc90 141.16,150.37 141.16,152.12 arc90 141,152.28 140.74,152.28 arc90 140.58,152.12 140.58,150.37 arc90 140.74,150.21 140.87,150.21
N$257
  Top 0.001: 140.29,155.44 140.87,155.44 | 140.87,155.44 141.45,155.44 | 140.87,155.44 140.87,156.85 | 140.87,154.04 140.87,154.22 | 140.87,154.22 140.87,154.29 | 140.87,154.29 140.87,154.41 | 140.87,154.41 140.87,155.44 | 140.87,154.29 141.03,154.29 arc90 141.2,154.46 141.2,156.43 arc90 141.03,156.59 140.71,156.59 arc90 140.55,156.43 140.55,154.46 arc90 140.71,154.29 140.87,154.29 | 140.87,154.22 141.09,154.22 arc90 141.27,154.4 141.27,156.49 arc90 141.09,156.67 140.65,156.67 arc90 140.47,156.49 140.47,154.4 arc90 140.65,154.22 140.87,154.22 | 140.87,154.41 141,154.41 arc90 141.16,154.57 141.16,156.32 arc90 141,156.48 140.74,156.48 arc90 140.58,156.32 140.58,154.57 arc90 140.74,154.41 140.87,154.41
N$258
  Top 0.001: 129.45,125.28 130.03,125.28 | 130.03,125.28 130.6,125.28 | 130.03,124.7 130.03,125.28
N$261
  Top 0.001: 120.88,113.48 arc180 117.37,113.48 | 117.37,113.48 arc180 120.88,113.48 | 120.88,113.48 arc180 117.37,113.48 | 117.37,113.48 arc180 120.88,113.48
N$265
  Top 0.001: 140.75,153.86 140.67,153.78 | 140.75,154.1 140.75,153.86 | 140.67,154.18 140.75,154.1 | 140.99,153.86 141.07,153.78 | 140.75,153.86 140.99,153.86 | 140.99,153.86 140.99,154.1 | 140.99,154.1 140.75,154.1 | 140.99,154.1 141.07,154.18 | 140.67,154.18 140.67,153.78 | 140.67,153.78 141.07,153.78 | 141.07,153.78 141.07,154.18 | 141.07,154.18 140.67,154.18 | 140.39,154.46 140.39,156.43 arc-90 140.71,156.75 141.03,156.75 arc-90 141.35,156.43 141.35,154.46 arc-90 141.03,154.14 140.71,154.14 arc-90 140.39,154.46
N$267
  Top 0.001: 139.48,153.86 139.4,153.78 | 139.48,154.1 139.48,153.86 | 139.4,154.18 139.48,154.1 | 139.72,153.86 139.8,153.78 | 139.48,153.86 139.72,153.86 | 139.72,153.86 139.72,154.1 | 139.72,154.1 139.48,154.1 | 139.72,154.1 139.8,154.18 | 142.02,153.86 141.94,153.78 | 142.02,154.1 142.02,153.86 | 141.94,154.18 142.02,154.1 | 142.26,153.86 142.34,153.78 | 142.02,153.86 142.26,153.86 | 142.26,153.86 142.26,154.1 | 142.26,154.1 142.02,154.1 | 142.26,154.1 142.34,154.18 | 139.4,154.18 139.4,153.78 | 139.4,153.78 139.8,153.78 | 139.8,153.78 139.8,154.18 | 139.8,154.18 139.4,154.18 | 141.94,154.18 141.94,153.78 | 141.94,153.78 142.34,153.78 | 142.34,153.78 142.34,154.18 | 142.34,154.18 141.94,154.18 | 142.02,158.01 142.46,157.56 arc-45 142.49,157.49 142.49,156.73 arc45 142.52,156.66 arc-46 142.62,156.43 142.62,154.46 arc-90 142.3,154.14 141.98,154.14 arc-90 141.66,154.46 141.66,156.43 arc-46 141.76,156.66 arc45 141.79,156.73 141.79,157.2 arc45 141.76,157.27 141.73,157.3 arc45 141.66,157.33 140.08,157.33 arc45 140.01,157.3 139.98,157.27 arc45 139.95,157.2 139.95,156.73 arc45 139.98,156.66 arc-46 140.08,156.43 140.08,154.46 arc-90 139.76,154.14 139.44,154.14 arc-90 139.12,154.46 139.12,156.43 arc-46 139.22,156.66 arc45 139.25,156.73 139.25,157.49 arc-45 139.28,157.56 139.72,158.01 arc-45 139.79,158.04 141.95,158.04 arc-45 142.02,158.01
N$268
  Top 0.001: 143.89,150.26 arc-90 143.57,149.94 143.25,149.94 arc-90 142.93,150.26 142.93,152.23 arc-20 142.95,152.34 142.96,152.36 142.96,154.33 142.95,154.35 arc-20 142.93,154.46 142.93,156.43 arc-90 143.25,156.75 143.57,156.75 arc-90 143.89,156.43 143.89,154.46 arc-20 143.87,154.35 143.86,154.33 143.86,152.36 143.87,152.34 arc-20 143.89,152.23 143.89,150.26
N$269
  Top 0.001: 138.68,154.16 138.68,152.53 arc45 138.71,152.46 arc-46 138.81,152.23 138.81,150.26 arc-90 138.49,149.94 138.17,149.94 arc-90 137.85,150.26 137.85,152.23 arc-46 137.95,152.46 arc45 137.98,152.53 137.98,154.16 arc45 137.95,154.23 arc-46 137.85,154.46 137.85,156.43 arc-90 138.17,156.75 138.49,156.75 arc-90 138.81,156.43 138.81,154.46 arc-46 138.71,154.23 arc45 138.68,154.16
N$271
  Top 0.001: 131.87,136.34 131.87,149.88 arc45 131.84,149.95 arc45 131.77,149.98 115.01,149.98 arc45 114.94,149.95 arc45 114.91,149.88 | 131.87,126.94 131.87,125.43 | 131.87,105.99 arc-90 131.77,105.89 | 115.01,105.89 arc-90 114.91,105.99 | 114.91,149.88 114.91,182.84 | 114.91,182.84 arc-90 115.01,182.94 | 120.92,182.94 122.42,182.94 | 145.44,182.94 arc-90 145.54,182.84 | 145.54,136.5 arc-90 145.44,136.39 | 118.23,136.39 117.03,136.39 | 115.01,136.39 arc-90 114.91,136.5 | 114.91,136.34 114.91,136.5 | 131.87,136.34 arc90 131.77,136.44 118.23,136.44 arc90 118.13,136.34 118.13,131.58 arc45 118.16,131.51 122.95,126.71 arc45 123.03,126.68 127.52,126.68 arc45 127.59,126.71 127.69,126.82 127.7,126.83 127.72,126.87 127.72,126.91 127.72,126.93 127.71,126.94 arc-17 127.69,127.08 127.69,127.67 127.69,127.68 127.69,129.77 arc90 127.59,129.87 127.03,129.87 arc-90 126.93,129.97 126.93,131.77 arc-90 127.03,131.87 127.77,131.87 127.83,131.92 127.83,131.96 arc-84 128.12,132.22 128.25,132.22 arc-84 128.54,131.96 128.54,131.92 128.6,131.87 129.34,131.87 arc-90 129.44,131.77 129.44,129.97 arc-90 129.34,129.87 128.78,129.87 arc90 128.68,129.77 128.68,128.09 128.69,128.08 128.69,127.08 arc-15 128.67,126.95 128.67,126.94 128.67,126.93 128.66,126.91 128.66,126.91 arc-3 128.66,126.89 128.66,126.88 128.66,126.86 arc45 128.69,126.79 128.8,126.68 128.81,126.67 128.85,126.65 128.88,126.65 128.89,126.66 arc-3 128.91,126.66 128.92,126.66 128.93,126.66 128.96,126.67 128.97,126.67 arc-14 129.09,126.69 130.23,126.69 130.23,126.68 130.62,126.68 arc45 130.69,126.71 130.69,126.71 arc16 130.71,126.74 130.72,126.75 130.72,126.76 arc-76 130.82,126.84 131.77,126.84 arc90 131.87,126.94